# EAGLE board Roland+memframeco (EAGLE 6.6.0), part 1 of 2
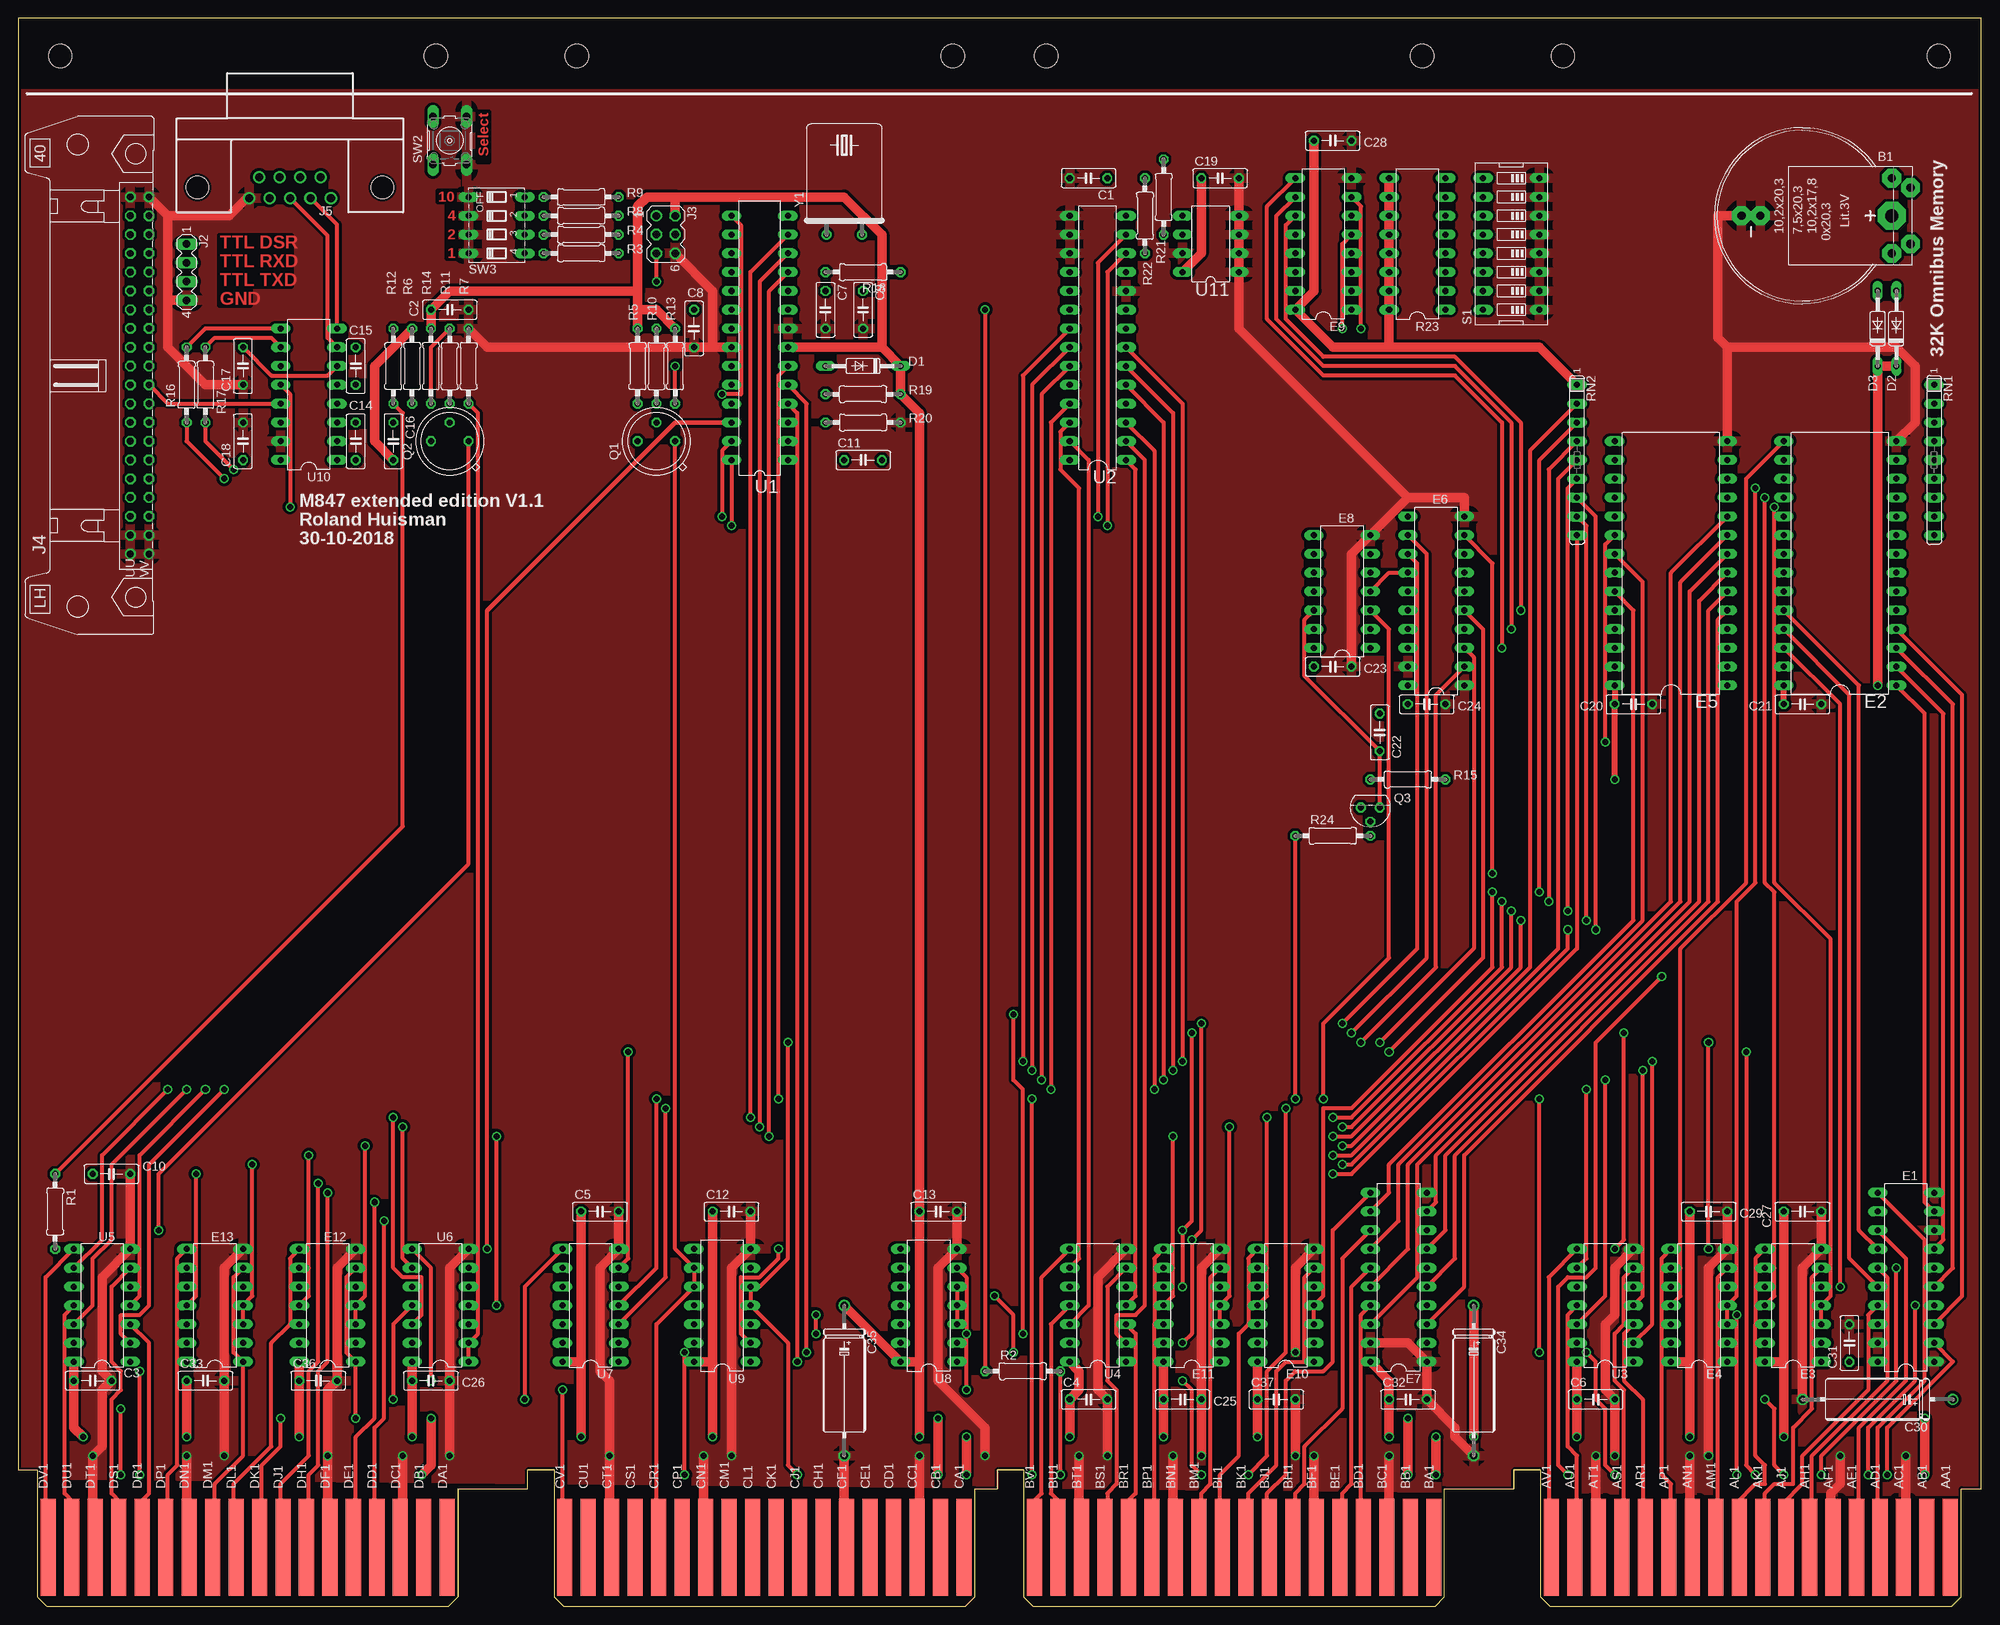
[diagram p0: board, top side]
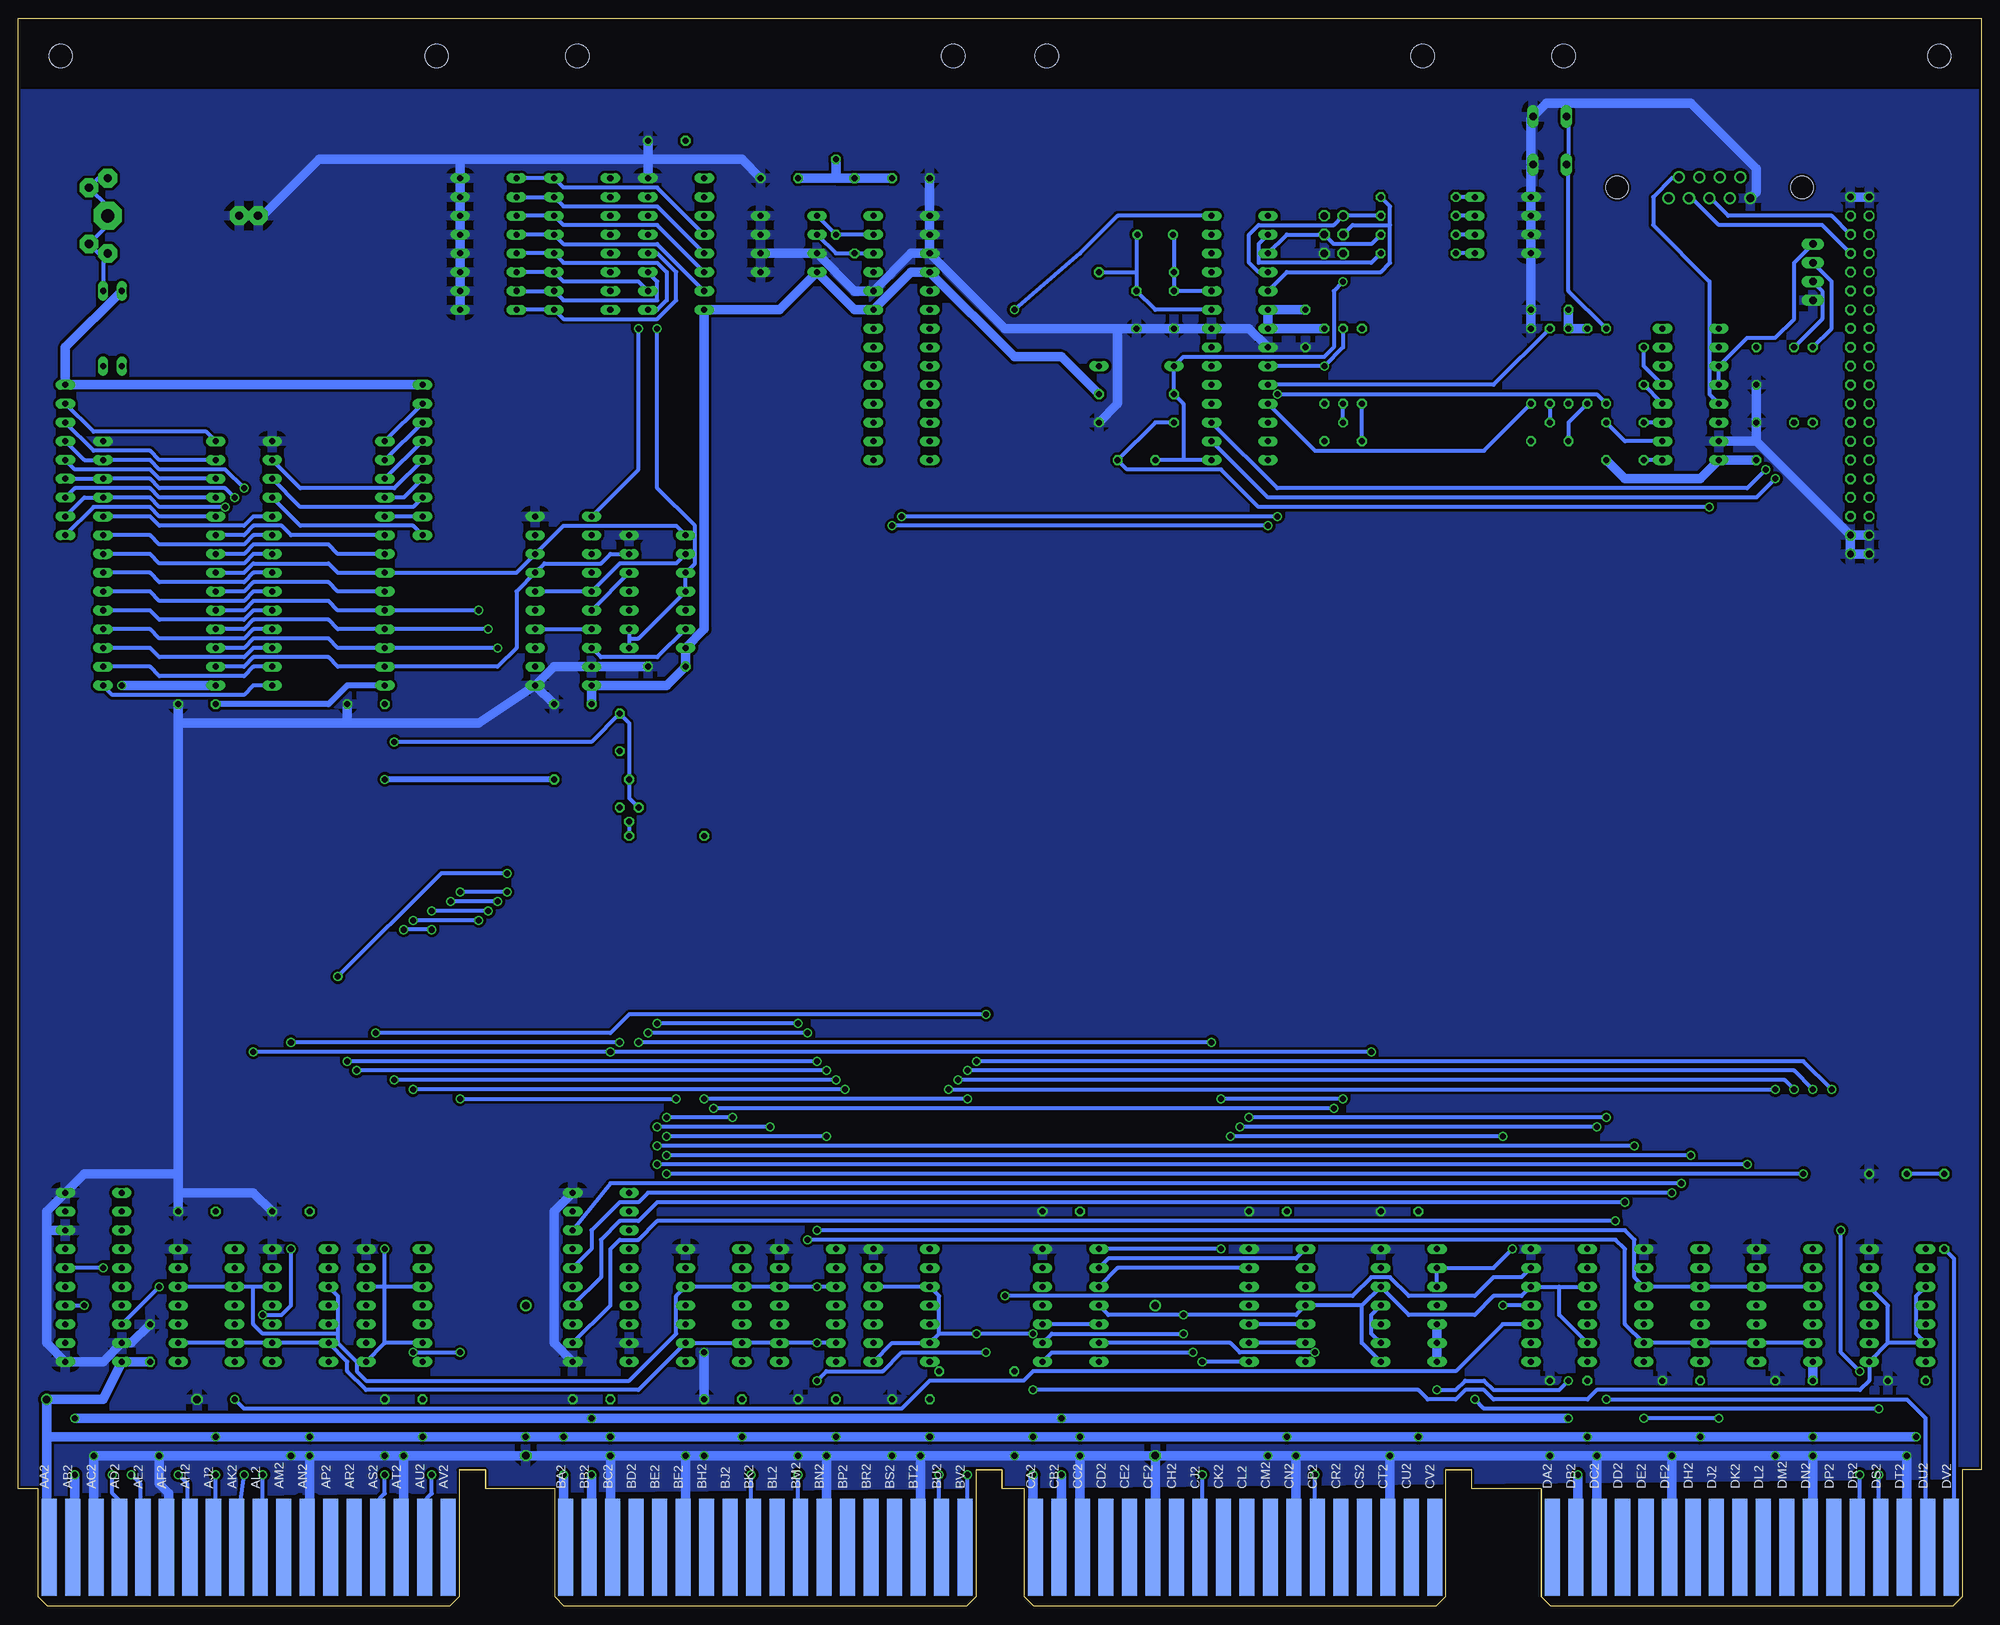
[diagram p1: board, bottom side, seen from below]

Size 265.3 x 214.63 mm. Coordinates in mm from the lower left corner, seen from the top.
Copper layers (1+16): Top 0.035mm / dielectric 1.5mm / Bottom 0.035mm
Design rules "16mils *": minimum track width 16mil, minimum drill 32mil, track to track 15mil, track to pad 10mil, pad to pad 10mil, via to via 10mil, smd to smd 10mil, copper to edge 13mil, drill to drill 10mil, minimum pad ring 10mil, minimum via ring 8mil, stop-mask expansion 0mil, vias tented up to drill 0mil, thermal gap 30mil
Net classes: 0 default: width 0.508 mm; 1 supply: width 1.27 mm

## Footprints (pad centres in the part's own frame; a part is rotated, then mirrored left to right if it is on the bottom)
B2430UNI = drill 1.118 pad 2.54 octagon: + 3.81,14.605; +@1 -3.81,14.605; +@2 -5.08,12.065; +@3 5.08,12.065; - 0,-5.715; -@1 0,-8.255 | drill 1.803 pad 3.81 octagon: +@4 0,12.065
C050-025X075 = drill 0.813 octagon: 1 -2.54,0; 2 2.54,0
E12-8 = drill 1.016: + -10.16,0 | drill 1.016 octagon: - 10.16,0
DO35-10 = drill 0.813 long: A 5.08,0; C -5.08,0
DIL20 = drill 0.813 long: 1 -11.43,-3.81; 2 -8.89,-3.81; 3 -6.35,-3.81; 4 -3.81,-3.81; 5 -1.27,-3.81; 6 1.27,-3.81; 7 3.81,-3.81; 8 6.35,-3.81; 9 8.89,-3.81; 10 11.43,-3.81; 11 11.43,3.81; 12 8.89,3.81; 13 6.35,3.81; 14 3.81,3.81; 15 1.27,3.81; 16 -1.27,3.81; 17 -3.81,3.81; 18 -6.35,3.81; 19 -8.89,3.81; 20 -11.43,3.81
DIL28-6 = drill 0.813 long: 1 -16.51,-7.62; 2 -13.97,-7.62; 3 -11.43,-7.62; 4 -8.89,-7.62; 5 -6.35,-7.62; 6 -3.81,-7.62; 7 -1.27,-7.62; 8 1.27,-7.62; 9 3.81,-7.62; 10 6.35,-7.62; 11 8.89,-7.62; 12 11.43,-7.62; 13 13.97,-7.62; 14 16.51,-7.62; 15 16.51,7.62; 16 13.97,7.62; 17 11.43,7.62; 18 8.89,7.62; 19 6.35,7.62; 20 3.81,7.62; 21 1.27,7.62; 22 -1.27,7.62; 23 -3.81,7.62; 24 -6.35,7.62; 25 -8.89,7.62; 26 -11.43,7.62; 27 -13.97,7.62; 28 -16.51,7.62
DIL14 = drill 0.813 long: 1 -7.62,-3.81; 2 -5.08,-3.81; 3 -2.54,-3.81; 4 0,-3.81; 5 2.54,-3.81; 6 5.08,-3.81; 7 7.62,-3.81; 8 7.62,3.81; 9 5.08,3.81; 10 2.54,3.81; 11 0,3.81; 12 -2.54,3.81; 13 -5.08,3.81; 14 -7.62,3.81
DIL16 = drill 0.813 long: 1 -8.89,-3.81; 2 -6.35,-3.81; 3 -3.81,-3.81; 4 -1.27,-3.81; 5 1.27,-3.81; 6 3.81,-3.81; 7 6.35,-3.81; 8 8.89,-3.81; 9 8.89,3.81; 10 6.35,3.81; 11 3.81,3.81; 12 1.27,3.81; 13 -1.27,3.81; 14 -3.81,3.81; 15 -6.35,3.81; 16 -8.89,3.81
EDGE-CON8 = smd 2.032 x 13.106: AA1 261.303,7.938; AB1 258.127,7.938; AC1 254.952,7.938; AD1 251.778,7.938; AE1 248.602,7.938; AF1 245.428,7.938; AH1 242.252,7.938; AJ1 239.077,7.938; AK1 235.903,7.938; AL1 232.727,7.938; AM1 229.553,7.938; AN1 226.377,7.938; AP1 223.202,7.938; AR1 220.028,7.938; AS1 216.852,7.938; AT1 213.678,7.938; AU1 210.502,7.938; AV1 207.327,7.938; BA1 191.452,7.938; BB1 188.278,7.938; BC1 185.102,7.938; BD1 181.928,7.938; BE1 178.752,7.938; BF1 175.577,7.938; BH1 172.403,7.938; BJ1 169.227,7.938; BK1 166.053,7.938; BL1 162.877,7.938; BM1 159.702,7.938; BN1 156.528,7.938; BP1 153.352,7.938; BR1 150.178,7.938; BS1 147.002,7.938; BT1 143.827,7.938; BU1 140.653,7.938; BV1 137.477,7.938; CA1 127.953,7.938; CB1 124.778,7.938; CC1 121.603,7.938; CD1 118.427,7.938; CE1 115.252,7.938; CF1 112.078,7.938; CH1 108.903,7.938; CJ1 105.728,7.938; CK1 102.552,7.938; CL1 99.377,7.938; CM1 96.203,7.938; CN1 93.028,7.938; CP1 89.853,7.938; CR1 86.677,7.938; CS1 83.502,7.938; CT1 80.328,7.938; CU1 77.153,7.938; CV1 73.978,7.938; DA1 58.102,7.938; DB1 54.928,7.938; DC1 51.752,7.938; DD1 48.578,7.938; DE1 45.403,7.938; DF1 42.227,7.938; DH1 39.053,7.938; DJ1 35.877,7.938; DK1 32.703,7.938; DL1 29.527,7.938; DM1 26.352,7.938; DN1 23.177,7.938; DP1 20.003,7.938; DR1 16.828,7.938; DS1 13.652,7.938; DT1 10.477,7.938; DU1 7.303,7.938; DV1 4.128,7.938 | smd 2.032 x 13.106 bottom: AA2 261.303,7.938; AB2 258.127,7.938; AC2 254.952,7.938; AD2 251.778,7.938; AE2 248.602,7.938; AF2 245.428,7.938; AH2 242.252,7.938; AJ2 239.077,7.938; AK2 235.903,7.938; AL2 232.727,7.938; AM2 229.553,7.938; AN2 226.377,7.938; AP2 223.202,7.938; AR2 220.028,7.938; AS2 216.852,7.938; AT2 213.678,7.938; AU2 210.502,7.938; AV2 207.327,7.938; BA2 191.452,7.938; BB2 188.278,7.938; BC2 185.102,7.938; BD2 181.928,7.938; BE2 178.752,7.938; BF2 175.577,7.938; BH2 172.403,7.938; BJ2 169.227,7.938; BK2 166.053,7.938; BL2 162.877,7.938; BM2 159.702,7.938; BN2 156.528,7.938; BP2 153.352,7.938; BR2 150.178,7.938; BS2 147.002,7.938; BT2 143.827,7.938; BU2 140.653,7.938; BV2 137.477,7.938; CA2 127.953,7.938; CB2 124.778,7.938; CC2 121.603,7.938; CD2 118.427,7.938; CE2 115.252,7.938; CF2 112.078,7.938; CH2 108.903,7.938; CJ2 105.728,7.938; CK2 102.552,7.938; CL2 99.377,7.938; CM2 96.203,7.938; CN2 93.028,7.938; CP2 89.853,7.938; CR2 86.677,7.938; CS2 83.502,7.938; CT2 80.328,7.938; CU2 77.153,7.938; CV2 73.978,7.938; DA2 58.102,7.938; DB2 54.928,7.938; DC2 51.752,7.938; DD2 48.578,7.938; DE2 45.403,7.938; DF2 42.227,7.938; DH2 39.053,7.938; DJ2 35.877,7.938; DK2 32.703,7.938; DL2 29.527,7.938; DM2 26.352,7.938; DN2 23.177,7.938; DP2 20.003,7.938; DR2 16.828,7.938; DS2 13.652,7.938; DT2 10.477,7.938; DU2 7.303,7.938; DV2 4.128,7.938
MA04-1 = drill 1.016 long: 1 -3.81,0; 2 -1.27,0; 3 1.27,0; 4 3.81,0
MA03-2 = drill 1.016: 1 -2.54,-1.27 | drill 1.016 octagon: 2 -2.54,1.27; 3 0,-1.27; 4 0,1.27; 5 2.54,-1.27; 6 2.54,1.27
DEC40PINH = drill 0.914 octagon: A 24.13,1.27; AA -3.81,1.27; B 24.13,-1.27; BB -3.81,-1.27; C 21.59,1.27; CC -6.35,1.27; D 21.59,-1.27; DD -6.35,-1.27; E 19.05,1.27; EE -8.89,1.27; F 19.05,-1.27; FF -8.89,-1.27; H 16.51,1.27; HH -11.43,1.27; J 16.51,-1.27; JJ -11.43,-1.27; K 13.97,1.27; KK -13.97,1.27; L 13.97,-1.27; LL -13.97,-1.27; M 11.43,1.27; MM -16.51,1.27; N 11.43,-1.27; NN -16.51,-1.27; P 8.89,1.27; PP -19.05,1.27; R 8.89,-1.27; RR -19.05,-1.27; S 6.35,1.27; SS -21.59,1.27; T 6.35,-1.27; TT -21.59,-1.27; U 3.81,1.27; UU -24.13,1.27; V 3.81,-1.27; W 1.27,1.27; X 1.27,-1.27; Y -1.27,1.27; Z -1.27,-1.27 | drill 0.914: VV -24.13,-1.27
H5M09RA = drill 1.092: 1 -5.537,1.422; 2 -2.769,1.422; 3 0,1.422; 4 2.769,1.422; 5 5.537,1.422; 6 -4.153,-1.422; 7 -1.384,-1.422; 8 1.384,-1.422; 9 4.153,-1.422 | hole 3.048: -12.497,0; 12.497,0
TO5 = drill 0.813 octagon: 1 0,-2.54; 2 2.54,0; 3 0,2.54
TO92 = drill 0.813 octagon: 1 1.27,0; 2 0,1.905; 3 -1.27,0
0207/10 = drill 0.813 octagon: 1 -5.08,0; 2 5.08,0
SIL9 = drill 0.813 long: 1 -10.16,0; 2 -7.62,0; 3 -5.08,0; 4 -2.54,0; 5 0,0; 6 2.54,0; 7 5.08,0; 8 7.62,0; 9 10.16,0
EDG-08 = drill 0.813 long: 1 -8.89,-3.81; 2 -6.35,-3.81; 3 -3.81,-3.81; 4 -1.27,-3.81; 5 1.27,-3.81; 6 3.81,-3.81; 7 6.35,-3.81; 8 8.89,-3.81; 9 8.89,3.81; 10 6.35,3.81; 11 3.81,3.81; 12 1.27,3.81; 13 -1.27,3.81; 14 -3.81,3.81; 15 -6.35,3.81; 16 -8.89,3.81
B3F-10XX = drill 1.016 long: 1 -3.251,2.261; 2 3.251,2.261; 3 -3.251,-2.261; 4 3.251,-2.261
DIP04S = drill 0.813 long: 1 -3.81,-3.81; 2 -1.27,-3.81; 3 1.27,-3.81; 4 3.81,-3.81; 5 3.81,3.81; 6 1.27,3.81; 7 -1.27,3.81; 8 -3.81,3.81
DIL28-3 = drill 0.813 long: 1 -16.51,-3.81; 2 -13.97,-3.81; 3 -11.43,-3.81; 4 -8.89,-3.81; 5 -6.35,-3.81; 6 -3.81,-3.81; 7 -1.27,-3.81; 8 1.27,-3.81; 9 3.81,-3.81; 10 6.35,-3.81; 11 8.89,-3.81; 12 11.43,-3.81; 13 13.97,-3.81; 14 16.51,-3.81; 15 16.51,3.81; 16 13.97,3.81; 17 11.43,3.81; 18 8.89,3.81; 19 6.35,3.81; 20 3.81,3.81; 21 1.27,3.81; 22 -1.27,3.81; 23 -3.81,3.81; 24 -6.35,3.81; 25 -8.89,3.81; 26 -11.43,3.81; 27 -13.97,3.81; 28 -16.51,3.81
DIL8 = drill 0.813 long: 1 -3.81,-3.81; 2 -1.27,-3.81; 3 1.27,-3.81; 4 3.81,-3.81; 5 3.81,3.81; 6 1.27,3.81; 7 -1.27,3.81; 8 -3.81,3.81
OMNIBUS = hole 3.175: 208.915,209.55; 259.715,209.55; 189.865,209.55; 139.065,209.55; 75.616,209.55; 126.416,209.55; 56.566,209.55; 5.766,209.55
HC49U-H = drill 0.813: 1 -2.413,-5.08; 2 2.413,-5.08

## Placement (x,y rotation side)
B1  CR2032  [B2430UNI]  241.17,187.96 270 top
C1  100nF  [C050-025X075]  144.65,193.04 180 top
C2  100nF  [C050-025X075]  58.29,175.26 0 top
C3  100nF  [C050-025X075]  10.03,30.48 0 top
C4  100nF  [C050-025X075]  144.65,27.94 0 top
C5  100nF  [C050-025X075]  78.61,53.34 0 top
C6  100nF  [C050-025X075]  213.23,27.94 0 top
C7  22pF  [C050-025X075]  109.09,175.26 270 top
C8  100nF  [C050-025X075]  91.31,172.72 270 top
C9  22pF  [C050-025X075]  114.17,175.26 270 top
C10  100nF  [C050-025X075]  12.57,58.42 0 top
C11  100nF  [C050-025X075]  114.17,154.94 0 top
C12  100nF  [C050-025X075]  96.39,53.34 0 top
C13  100nF  [C050-025X075]  124.33,53.34 0 top
C14  100nF  [C050-025X075]  45.59,157.48 90 top
C15  100nF  [C050-025X075]  45.59,167.64 90 top
C16  100nF  [C050-025X075]  50.67,157.48 270 top
C17  100nF  [C050-025X075]  30.35,167.64 90 top
C18  100nF  [C050-025X075]  30.35,157.48 90 top
C19  100nF  [C050-025X075]  162.43,193.04 0 top
C20  100nF  [C050-025X075]  218.31,121.92 0 top
C21  100nF  [C050-025X075]  241.17,121.92 0 top
C22  200pF  [C050-025X075]  184.02,118.11 270 top
C23  100nF  [C050-025X075]  177.67,127 0 top
C24  100nF  [C050-025X075]  190.37,121.92 0 top
C25  100nF  [C050-025X075]  157.35,27.94 0 top
C26  100nF  [C050-025X075]  55.75,30.48 0 top
C27  100nF  [C050-025X075]  241.17,53.34 0 top
C28  100nF  [C050-025X075]  177.67,198.12 0 top
C29  100nF  [C050-025X075]  228.47,53.34 0 top
C30  6.8uF  [E12-8]  251.33,27.94 180 top
C31  100nF  [C050-025X075]  247.52,35.56 90 top
C32  100nF  [C050-025X075]  187.83,27.94 0 top
C33  100nF  [C050-025X075]  25.27,30.48 0 top
C34  6.8uF  [E12-8]  196.72,30.48 270 top
C35  6.8uF  [E12-8]  111.63,30.48 270 top
C36  100nF  [C050-025X075]  40.51,30.48 0 top
C37  100nF  [C050-025X075]  170.05,27.94 0 top
D1  1N4148  [DO35-10]  114.17,167.64 180 top
D2  BAT86  [DO35-10]  253.87,172.72 90 top
D3  BAT86  [DO35-10]  251.33,172.72 90 top
E1  74LS244N  [DIL20]  255.14,44.45 90 top
E2  62256  [DIL28-6]  246.25,140.97 90 top
E3  74LS38N  [DIL14]  239.9,40.64 90 top
E4  74LS38N  [DIL14]  227.2,40.64 90 top
E5  62256  [DIL28-6]  223.39,140.97 90 top
E6  74LS540N  [DIL20]  191.64,135.89 90 top
E7  74LS244N  [DIL20]  186.56,44.45 90 top
E8  74LS10N  [DIL14]  178.94,137.16 90 top
E9  74LS151N  [DIL16]  176.4,184.15 90 top
E10  74LS38N  [DIL14]  171.32,40.64 90 top
E11  74LS38N  [DIL14]  158.62,40.64 90 top
E12  74LS38N  [DIL14]  41.78,40.64 90 top
E13  74LS38N  [DIL14]  26.54,40.64 90 top
J1  EDGE  [EDGE-CON8]  -0.13,0 0 top
J2  COMM  [MA04-1]  22.73,180.34 270 top
J3  ICSP  [MA03-2]  87.5,185.42 270 top
J4  Serial  [DEC40PINH]  16.38,166.37 90 top
J5  D-SUB9-HM  [H5M09RA]  36.7,191.77 180 top
Q1  BC547  [TO5]  86.23,157.48 90 top
Q2  BC547  [TO5]  58.29,157.48 90 top
Q3  2N3904  [TO92]  182.75,107.95 180 top
R1  1K  [0207/10]  4.95,53.34 270 top
R2  1K  [0207/10]  135.76,31.75 0 top
R3  1K  [0207/10]  76.07,182.88 180 top
R4  1K  [0207/10]  76.07,185.42 180 top
R5  27  [0207/10]  83.69,167.64 90 top
R6  27  [0207/10]  53.21,167.64 90 top
R7  4.7K  [0207/10]  60.83,167.64 270 top
R8  1K  [0207/10]  76.07,187.96 180 top
R9  1K  [0207/10]  76.07,190.5 180 top
R10  27  [0207/10]  86.23,167.64 270 top
R11  27  [0207/10]  58.29,167.64 270 top
R12  47  [0207/10]  50.67,167.64 90 top
R13  470  [0207/10]  88.77,167.64 90 top
R14  470  [0207/10]  55.75,167.64 90 top
R15  100K  [0207/10]  187.83,111.76 0 top
R16  1K  [0207/10]  22.73,165.1 90 top
R17  1K  [0207/10]  25.27,165.1 90 top
R18  1M  [0207/10]  114.17,180.34 180 top
R19  10K  [0207/10]  114.17,163.83 0 top
R20  1K  [0207/10]  114.17,160.02 180 top
R21  4.7K  [0207/10]  154.81,190.5 90 top
R22  4.7K  [0207/10]  152.27,187.96 90 top
R23  10K  [DIL16]  189.1,184.15 90 top
R24  100K  [0207/10]  177.67,104.14 0 top
RN1  5K  [SIL9]  258.95,154.94 270 top
RN2  5K  [SIL9]  210.69,154.94 270 top
S1  01234567  [EDG-08]  201.8,184.15 90 top
SW2  10-XX  [B3F-10XX]  58.29,198.12 90 top
SW3  DIP-4  [DIP04S]  64.64,186.69 270 top
U1  MEGA328-P  [DIL28-3]  100.2,171.45 90 top
U2  MCP23017SP  [DIL28-3]  145.92,171.45 90 top
U3  74LS38N  [DIL14]  214.5,40.64 90 top
U4  74LS38N  [DIL14]  145.92,40.64 90 top
U5  74LS38N  [DIL14]  11.3,40.64 90 top
U6  74LS38N  [DIL14]  57.02,40.64 90 top
U7  74LS38N  [DIL14]  77.34,40.64 90 top
U8  74LS10N  [DIL14]  123.06,40.64 90 top
U9  74LS00N  [DIL14]  95.12,40.64 90 top
U10  MAX232  [DIL16]  39.24,163.83 90 top
U11  24LC1025P  [DIL8]  161.16,184.15 90 top
U$1  OUTLINE-OMNIBUS  [OMNIBUS]  -0.13,0 0 top
Y1  16.000MHz  [HC49U-H]  111.63,190.5 0 top

## Library data of the parts
B1 = battery
C1-C29 C31-C33 C36 C37 R1-R22 R24 = rcl
C30 C34 C35 E3 E4 E10-E13 J1 J4 U3-U7 U$1 = dec-con
D1-D3 = diode
E1 E6-E9 U8 U9 = 74xx-us
E2 E5 = memory-hitachi
J2 J3 = con-lstb; OC_FARNELL: unknown; OC_NEWARK: unknown
J5 = con-thomas-betts; OC_FARNELL: unknown; OC_NEWARK: unknown
Q1-Q3 = transistor
R23 = resistor-dil
RN1 RN2 = resistor-sil; OC_FARNELL: unknown; OC_NEWARK: unknown
S1 = special
SW2 = switch-omron; MPN: B3F-1000; OC_FARNELL: 176432; OC_NEWARK: 36M3542
SW3 = switch-dil; OC_FARNELL: unknown; OC_NEWARK: unknown
U1 = atmel; OC_FARNELL: unknown; OC_NEWARK: unknown
U2 = microchip; MF: MICROCHIP; MPN: MCP23017-E/SP; OC_FARNELL: 1332088; OC_NEWARK: 31K2959
U10 = maxim; MF: MAXIM; MPN: MAX232ACPE+; OC_FARNELL: 9723773; OC_NEWARK: 68K4544
U11 = microchip; MF: MICROCHIP; MPN: 24LC025-I/P; OC_FARNELL: unknown; OC_NEWARK: 92C7098
Y1 = crystal; OC_FARNELL: 1666973; OC_NEWARK: unknown

## Nets
!BEMA0: E1.18 E2.26 E5.26 E9.9
!BEMA1: E1.16 E2.25 E5.25 E9.10
!BEMA2: E1.14 E2.24 E5.24 E9.11
!BMA00: E1.9 E2.1 E5.1
!BMA01: E1.7 E2.2 E5.2
!BMA02: E1.5 E2.3 E5.3
!BMA03: E1.3 E2.4 E5.4
!BMA04: E2.5 E5.5 E7.3
!BMA05: E2.6 E5.6 E7.5
!BMA06: E2.7 E5.7 E7.7
!BMA07: E2.8 E5.8 E7.9
!BMA08: E2.9 E5.9 E7.18
!BMA09: E2.10 E5.10 E7.16
!BMA10: E2.21 E5.21 E7.14
!BMA11: E2.23 E5.23 E7.12
!BMD_DIR: E6.14 E8.4
!BREAK_CYCLE: J1.BL2
!BRK_DATA: J1.BK2 U7.3
!BRK_IN_PROG: J1.BE2
!BSOURCE: E6.4 E6.17
!BUS_STROBE: J1.CK1
!C0: J1.CE1
!C1: J1.CH1
!C2: J1.CJ1
!CE: C22.1 E2.20 E5.20 Q3.1 R15.1
!CE_OK: C22.2 E8.12 Q3.3
!CPMA_DISABLE: J1.CU1
!D: J1.DK2
!DATA00: J1.AR1 U3.3
!DATA01: J1.AS1 U3.6
!DATA02: J1.AU1 U3.11
!DATA03: J1.AV1 U3.8
!DATA04: J1.BR1 U4.3
!DATA05: J1.BS1 U4.6
!DATA06: J1.BU1 U4.11
!DATA07: J1.BV1 U4.8
!DATA08: J1.DR1 U5.3
!DATA09: J1.DS1 U5.6
!DATA10: J1.DU1 U5.11
!DATA11: J1.DV1 U5.8
!DISABLE: E8.1 E8.2 E8.10 E8.11 E9.5
!E: J1.DL2
!EMA0: E1.2 J1.AD2
!EMA1: E1.4 J1.AE2
!EMA2: E1.6 J1.AH2
!F: J1.DJ2
!FSET: J1.DP2
!IND1: J1.CU2
!IND2: J1.CV2
!INT_RQST: J1.CP1
!INTERNAL_IO: J1.CL1
!IO_PAUSE: J1.CD1
!IR0: J1.DD2
!IR1: J1.DE2
!IR2: J1.DH2
!KEY_CONT: J1.DU2 U6.11
!LA_ENABLE: J1.BM2 U6.6
!LINK: J1.AV2
!LINK_DATA: J1.CR2
!LINK_LOAD: J1.CS2
!LOAD_CONT: J1.BH2
!MA00: E1.11 J1.AD1
!MA01: E1.13 J1.AE1
!MA02: E1.15 J1.AH1
!MA03: E1.17 J1.AJ1
!MA04: E7.17 J1.BD1
!MA05: E7.15 J1.BE1
!MA06: E7.13 J1.BH1
!MA07: E7.11 J1.BJ1
!MA08: E7.2 J1.DD1
!MA09: E7.4 J1.DE1
!MA10: E7.6 J1.DH1
!MA11: E7.8 J1.DJ1
!MD00: E3.1 E3.6 J1.AK1
!MD01: E3.8 E3.12 J1.AL1
!MD02: E4.1 E4.6 J1.AM1
!MD03: E4.8 E4.12 J1.AP1
!MD04: E10.1 E10.6 J1.BK1
!MD05: E10.8 E10.12 J1.BL1
!MD06: E11.1 E11.6 J1.BM1
!MD07: E11.8 E11.12 J1.BP1
!MD08: E12.1 E12.6 J1.DK1
!MD09: E12.8 E12.12 J1.DL1
!MD10: E13.1 E13.6 J1.DM1
!MD11: E13.8 E13.12 J1.DP1
!MD_DIR: E6.5 J1.AK2 U7.6
!MEM_START: J1.AJ2 U6.3
!MS_DISABLE: J1.CV1 U6.8
!NOT_LAST_TR: J1.CM1
!NTS_STALL: J1.BR2
!OE: E2.22 E5.22 E6.8 E8.8
!OVERFLOW: J1.BJ2
!RESET: C11.1 D1.A J3.5 R19.1 U1.1
!ROM_ADDR: E6.9 J1.AU2
!RUN: J1.BU2 R2.2
!SKIP: J1.CS1
!STOP: J1.DS2 U7.8
!TP4: E6.18 E8.13
!TS1: J1.CK2
!TS2: J1.CL2
!TS3: J1.CM2
!TS4: J1.CP2 U8.13
!USER_MODE: J1.DM2
!W_KEY_CONTROL: U1.13 U6.12
!W_LA_ENABLE: U1.11 U6.4
!W_MEM_START: R7.2 U1.25 U6.1 U6.2
!W_MS_IR_DISABLE: U1.12 U6.9
!WE: E2.27 E5.27 E6.7 E8.6
+15V: J1.DA2
-15V [supply]: J1.AB2 J1.BB2 J1.CB2 J1.DB2
BMD_DIR: E6.6 E6.15 E8.9
BSOURCE: E6.16 E8.5
DIP_1: R3.1 U1.16
DIP_2: J3.4 R4.1 U1.17
DIP_3: J3.1 R8.1 U1.18
DIP_4: J3.3 R9.1 U1.19
DSR232: J4.Z J5.6 U10.13
ENA_DATA: U3.1 U3.5 U3.10 U3.13 U4.1 U4.5 U4.10 U4.13 U5.1 U5.5 U5.10 U5.13 U8.6
EXAM: U1.6 U7.2 U7.4
FLIP_FLOP: U6.5 U6.10 U6.13 U7.1 U7.5 U8.2 U8.11 U9.11
GND [supply]: B1.- B1.-@1 C1.2 C2.2 C3.2 C4.2 C5.2 C6.2 C7.2 C8.2 C9.2 C10.2 C12.2 C13.2 C17.1 C18.2 C19.2 C20.2 C21.2 C23.2 C24.2 C25.2 C26.2 C27.2 C28.2 C29.2 C30.- C31.2 C32.2 C33.2 C34.- C35.- C36.2 C37.2 E1.1 E1.8 E1.10 E1.19 E2.14 E3.7 E4.7 E5.14 E6.1 E6.10 E6.19 E7.1 E7.10 E7.19 E8.7 E9.8 E10.7 E11.7 E12.7 E13.7 J1.AC1 J1.AC2 J1.AF1 J1.AF2 J1.AN1 J1.AN2 J1.AT1 J1.AT2 J1.BC1 J1.BC2 J1.BF1 J1.BF2 J1.BN1 J1.BN2 J1.BT1 J1.BT2 J1.CC1 J1.CC2 J1.CF1 J1.CF2 J1.CN1 J1.CN2 J1.CT1 J1.CT2 J1.DC1 J1.DC2 J1.DF1 J1.DF2 J1.DN1 J1.DN2 J1.DT1 J1.DT2 J2.4 J3.6 J4.A J4.B J4.SS J4.TT J4.UU J4.VV J5.5 R7.1 R20.1 S1.1 S1.2 S1.3 S1.4 S1.5 S1.6 S1.7 S1.8 SW2.3 SW2.4 SW3.1 SW3.2 SW3.3 SW3.4 U1.8 U1.22 U2.10 U2.15 U2.16 U2.17 U3.7 U4.7 U5.7 U6.7 U7.7 U8.7 U9.7 U10.15 U11.1 U11.2 U11.3 U11.4 U11.7
INHIBIT: J1.AP2
INITIALIZE: J1.CR1 Q1.1 U9.9 U9.10
INT_IN_PROG: J1.BP2
INT_STROBE: J1.BD2
MEM00: E2.11 E3.3 E3.4 RN1.8
MEM01: E2.12 E3.9 E3.11 RN1.6
MEM02: E2.13 E4.3 E4.4 RN1.4
MEM03: E2.15 E4.9 E4.11 RN1.2
MEM04: E5.16 E10.3 E10.4 RN2.3
MEM05: E5.17 E10.9 E10.11 RN2.4
MEM06: E5.18 E11.3 E11.4 RN2.6
MEM07: E5.19 E11.9 E11.11 RN2.8
MEM08: E5.15 E12.3 E12.4 RN2.2
MEM09: E5.13 E12.9 E12.11 RN2.5
MEM10: E5.12 E13.3 E13.4 RN2.7
MEM11: E5.11 E13.9 E13.11 RN2.9
MEM12: E2.16 RN1.3
MEM13: E2.17 RN1.5
MEM14: E2.18 RN1.7
MEM15: E2.19 RN1.9
N$1: C7.1 R18.2 U1.10 Y1.1
N$2: C9.1 R18.1 U1.9 Y1.2
N$4: Q1.3 R5.1
N$5: Q1.2 R10.2
N$6: Q2.3 R6.1
N$7: Q2.2 R11.2
N$8: U9.3 U9.12
N$9: U8.3 U8.4 U8.5 U8.12
N$10: U8.8 U9.2 U9.13
N$12: R17.1 U1.3
N$13: R16.1 U1.2
N$14: U8.10 U9.6
N$15: U8.9 U9.8
N$16: C17.2 U10.6
N$17: C14.1 U10.1
N$25: B1.+ B1.+@1 B1.+@2 B1.+@3 B1.+@4 D2.A
N$26: E9.1 R23.4 S1.13
N$27: E9.2 R23.3 S1.14
N$28: E9.15 R23.5 S1.12
N$29: E9.14 R23.6 S1.11
N$30: E9.13 R23.7 S1.10
N$31: E9.12 R23.8 S1.9
N$32: E9.4 R23.1 S1.16
N$33: E9.3 R23.2 S1.15
N$36: Q3.2 R24.2
N$46: J1.AB1
N$47: J1.AA1
N$48: J1.BB1
N$49: J1.BA1
N$50: J1.CA1
N$51: J1.BS2
N$52: J1.CB1
N$53: J1.DA1
N$54: J1.DB1
N$827: C14.2 U10.3
N$914: C15.2 U10.5
N$915: C15.1 U10.4
N$916: C16.1 U10.2
N$918: R12.2 SW2.1 SW2.2
N$919: R3.2 SW3.5
N$920: R4.2 SW3.6
N$921: R8.2 SW3.7
N$922: R9.2 SW3.8
OE: E3.5 E3.10 E4.5 E4.10 E6.12 E10.5 E10.10 E11.5 E11.10 E12.5 E12.10 E13.5 E13.10
POWER_OK: J1.BV2 R24.1
PROG: C11.2 J2.1 R20.2 U10.11 U10.12
PULSE_LA: J1.DR2 Q2.1
R_RUN: R2.1 U1.14
R_SW: C10.1 R1.1 R12.1 U1.15
RETURN: J1.AR2
ROM_ADDR: E6.11 E9.7
RXD: J2.2 R16.2 U10.9
RXD232: J4.J J5.2 U10.8
SCL: R22.1 U1.28 U2.12 U11.6
SDA: R21.1 U1.27 U2.13 U11.5
SET_FF: U1.4 U9.1
SHOW_DATA: U1.5 U8.1
SOURCE: E6.3 J1.AL2
STROBE: J1.AM2
SW: J1.DV2 R1.2
TP1: J1.CD2
TP2: J1.CE2
TP3: J1.CH2
TP4: E6.2 J1.CJ2 U9.4 U9.5
TXD: J2.3 R17.2 U10.10
TXD232: J4.F J5.3 U10.7
V+: C20.1 C21.1 D2.C D3.C E2.28 E5.28 R15.2
VCC [supply]: C1.1 C2.1 C3.1 C4.1 C5.1 C6.1 C8.1 C12.1 C13.1 C16.2 C18.1 C19.1 C23.1 C24.1 C25.1 C26.1 C27.1 C28.1 C29.1 C30.+ C31.1 C32.1 C33.1 C34.+ C35.+ C36.1 C37.1 D1.C D3.A E1.20 E3.14 E4.14 E6.20 E7.20 E8.14 E9.16 E10.14 E11.14 E12.14 E13.14 J1.AA2 J1.BA2 J1.CA2 J3.2 R5.2 R6.2 R13.2 R14.2 R19.2 R21.2 R22.2 R23.9 R23.10 R23.11 R23.12 R23.13 R23.14 R23.15 R23.16 RN1.1 RN2.1 U1.7 U1.20 U1.21 U2.9 U2.18 U3.14 U4.14 U5.14 U6.14 U7.12 U7.13 U7.14 U8.14 U9.14 U10.16 U11.8
W_DATA_00: U2.7 U3.2
W_DATA_01: U2.6 U3.4
W_DATA_02: U2.5 U3.12
W_DATA_03: U2.3 U3.9
W_DATA_04: U2.2 U4.2
W_DATA_05: U2.1 U4.4
W_DATA_06: U2.27 U4.12
W_DATA_07: U2.26 U4.9
W_DATA_08: U2.25 U5.2
W_DATA_09: U2.23 U5.4
W_DATA_10: U2.22 U5.12
W_DATA_11: U2.21 U5.9
W_INITIALIZE: R10.1 R13.1 U1.23
W_PULSE_LA: R11.1 R14.1 U1.24
W_STOP: U1.26 U7.9 U7.10
WE: E3.2 E3.13 E4.2 E4.13 E6.13 E10.2 E10.13 E11.2 E11.13 E12.2 E12.13 E13.2 E13.13
WRITE: E8.3 J1.AS2